# Altium PCB 1.PcbDoc (part 2 of 3)
Units mm, origin at the board's own origin, x right, y up, seen from the top; angles counter-clockwise.
Board outline 233.04 x 114.81 mm, 2 copper layers (Top Layer, Bottom Layer); 326 components, 324 nets, 1073 pads, 126 vias.
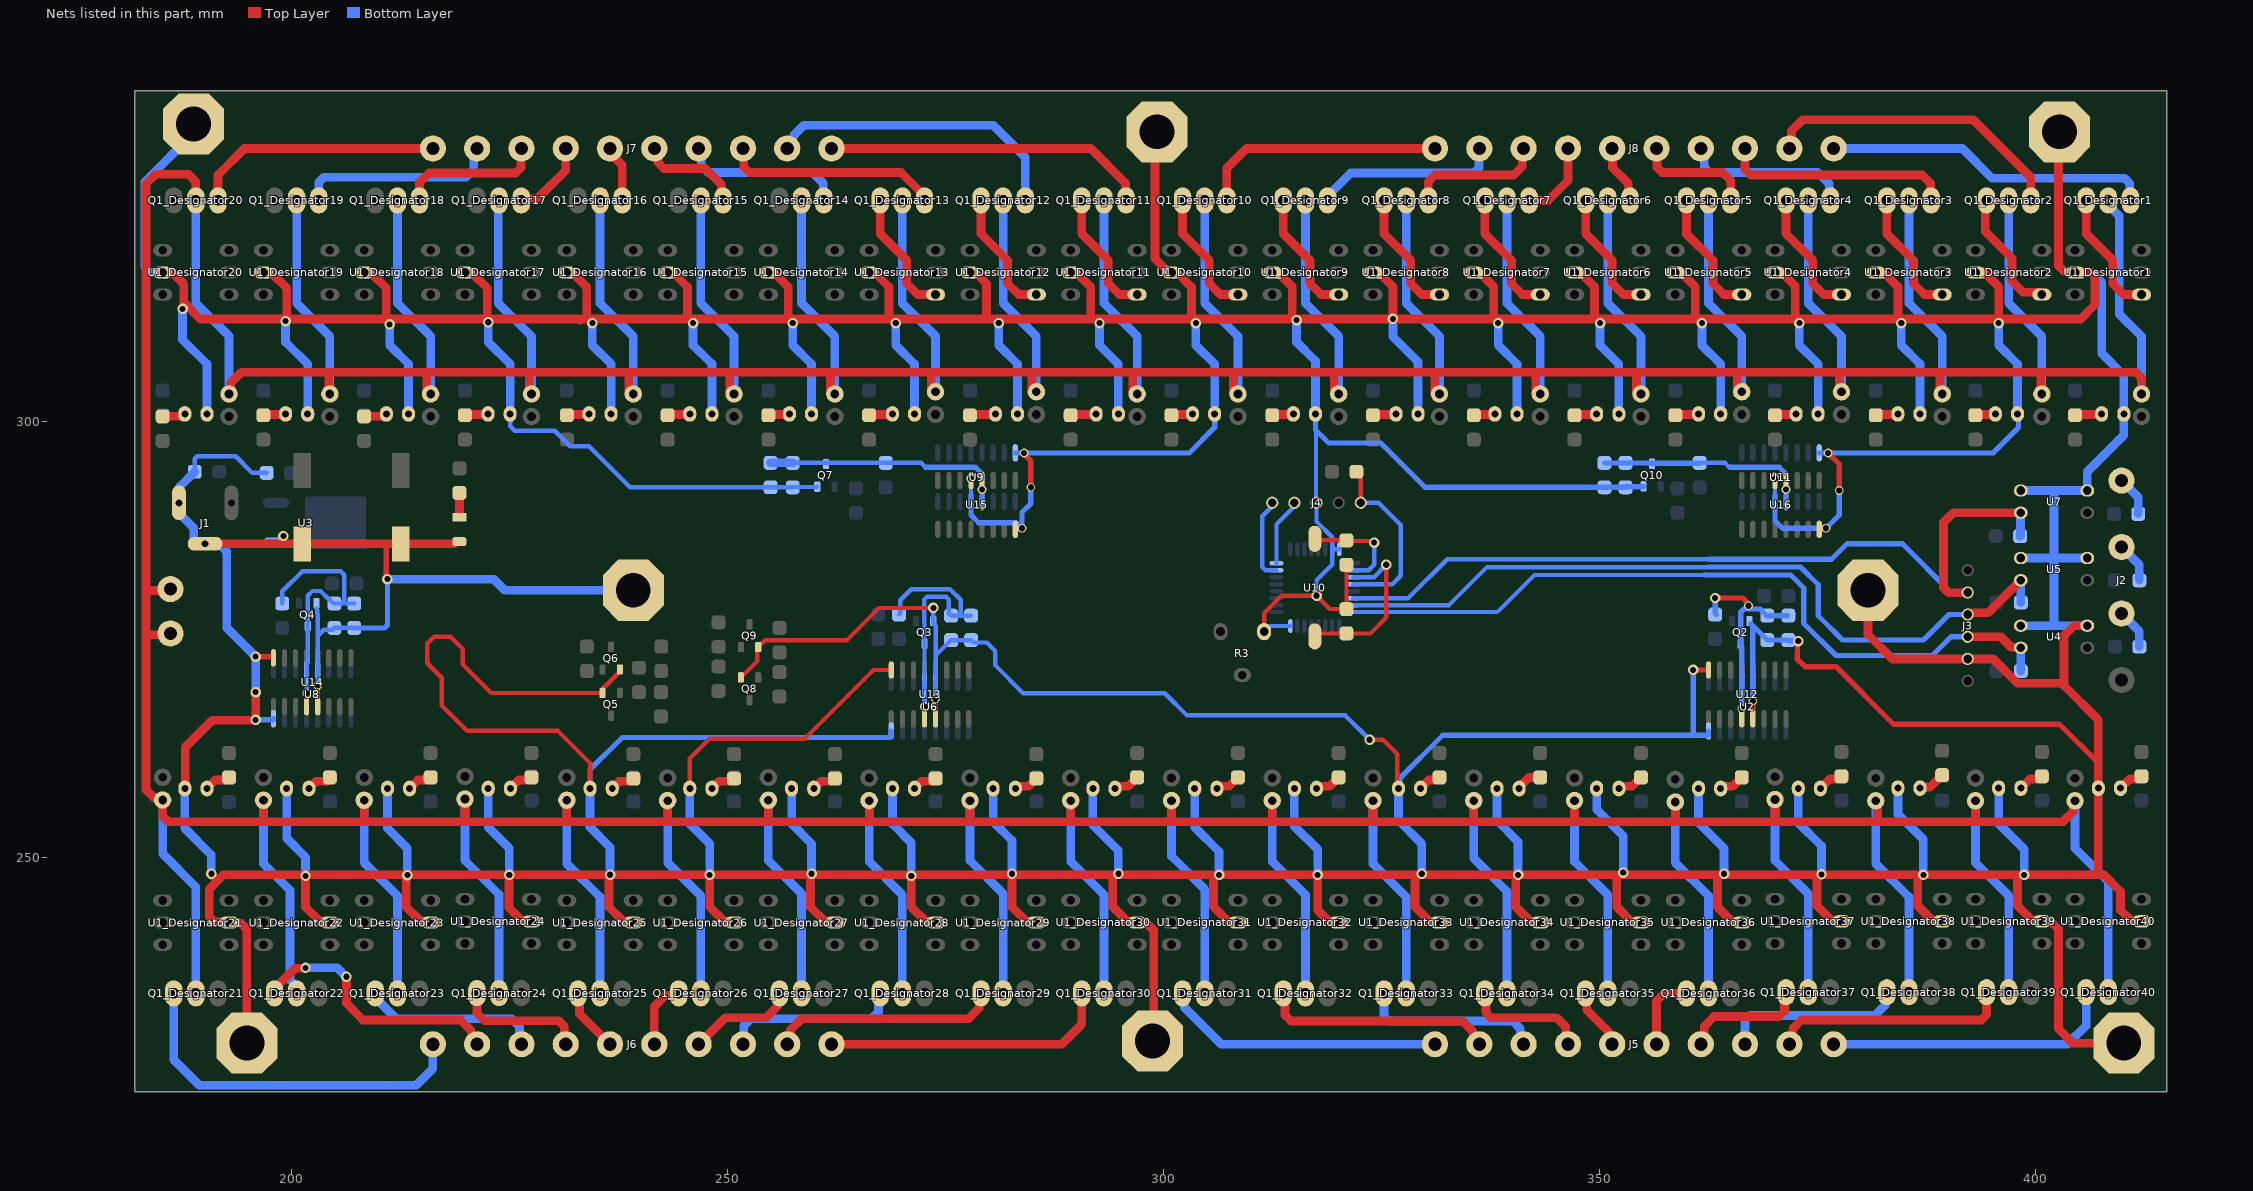
[diagram p2: the nets of this part, all layers, seen from the top]

## Via types
v1: diameter 1.2, hole 0.7, Top Layer to Bottom Layer, 83 vias
v2: diameter 1, hole 0.7, Top Layer to Bottom Layer, 40 vias
v3: diameter 1, hole 0.5, Top Layer to Bottom Layer, 3 vias

## Nets (pads, with @x,y where several pads share a name; then routed paths per layer and width w, separated by ;. In a path a pad name is that pad's centre, name@x,y a point inside that pad or via, vN(x,y) a via of type N, cw(c..) or ccw(c..) an arc to the next point about the centre after c; other vN are vias at no path point) (continued)
GND: C1.2 C2.2 C3.1 C4.1 C5.1 C6.1 C7.1 C8.2 C9.1 C10.2 C11.1 C12.1 C13.1 C14.1 C15.1 C16.1 D1.2 D2.2 D3.2 D4.2 D5.2 D6.2 D7.2 D8.2 D9.2 D10.2 D11.2 D12.2 D13.2 D14.2 D15.2 D16.2 D17.2 D18.2 D19.2 D20.2 D21.2 D22.2 D23.2 D24.2 D25.2 D26.2 D27.2 D28.2 D29.2 D30.2 D31.2 D32.2 D33.2 D34.2 D35.2 D36.2 D37.2 D38.2 D39.2 D40.2 D41.2 J1.2 J1.3 J3.2 J4.3 M1.1 M2.1 M3.1 M4.1 M5.1 M6.1 M7.1 M8.1 Q2.2 Q3.2 Q4.2 Q5.2 Q6.2 Q7.2 Q8.2 Q9.2 Q10.2 R3.1 U1_Designator1.2 U1_Designator2.2 U1_Designator3.2 U1_Designator4.2 U1_Designator5.2 U1_Designator6.2 U1_Designator7.2 U1_Designator8.2 U1_Designator9.2 U1_Designator10.2 U1_Designator11.2 U1_Designator12.2 U1_Designator13.2 U1_Designator14.2 U1_Designator15.2 U1_Designator16.2 U1_Designator17.2 U1_Designator18.2 U1_Designator19.2 U1_Designator20.2 U1_Designator21.2 U1_Designator22.2 U1_Designator23.2 U1_Designator24.2 U1_Designator25.2 U1_Designator26.2 U1_Designator27.2 U1_Designator28.2 U1_Designator29.2 U1_Designator30.2 U1_Designator31.2 U1_Designator32.2 U1_Designator33.2 U1_Designator34.2 U1_Designator35.2 U1_Designator36.2 U1_Designator37.2 U1_Designator38.2 U1_Designator39.2 U1_Designator40.2 U2.8 U2.13 U3.1 U4.2 U4.3 U5.2 U5.3 U6.8 U6.13 U7.2 U7.3 U8.8 U8.13 U9.8 U9.13 U10.16 U10.31 U10.32 U11.8 U11.13 U12.8 U12.13 U13.8 U13.13 U14.8 U14.13 U15.8 U15.13 U16.8 U16.13 | length 2085.3
  Top Layer w0.5: U14.13@202.946,267.323 v2(202.946,269.748) ; D17.2@234.188,257.937 234.188,260.858 230.505,264.541 220.091,264.541 217.17,267.462 217.17,270.637 215.519,272.288 215.519,274.574 216.281,275.336 218.186,275.336 219.583,273.939 219.583,272.161 222.855,268.889 Q5.2@235.601,268.889 235.701,268.989 235.701,269.429 237.601,271.329 Q6.2@237.601,271.579 ; D16.2@245.618,257.937 245.618,261.366 247.904,263.652 258.826,263.652 266.7,271.526 U13.8@268.732,271.526 ; Q8.2@251.476,270.667 251.476,270.917 251.576,271.017 251.826,271.017 253.376,272.567 253.376,274.063 Q9.2@253.476,274.163 253.476,274.413 253.576,274.513 253.826,274.513 254.268,274.955 263.652,274.955 267.335,278.638 v1(273.558,278.638) ; R3.1@311.491,275.931 311.491,278.05 313.476,280.035 v1(317.5,280.035) 319.021,278.514 C10.2@320.929,278.514 C8.2@320.929,283.588 ; v1(323.596,263.525) 325.12,263.525 326.771,261.874 326.771,258.064 D9.2@326.898,257.937
  Top Layer w0.6: v1(195.834,273.05) 197.866,273.05 U14.8@197.866,272.923 ; 210.82,285.995 210.82,282.067 v1(210.947,281.94) ; U13.13@273.812,265.926 v2(273.812,268.224) ; U15.8@282.956,287.655 282.956,287.719 283.654,287.719 v2(283.718,287.782) ; v2(283.972,296.418) 283.972,296.256 284.734,295.494 v2(284.734,292.478) ; v1(360.68,271.526) U12.8@362.458,271.526 ; U12.13@367.538,265.926 367.538,266.626 367.563,266.651 367.563,267.945 v2(367.538,267.97) ; v1(372.745,274.828) 372.668,274.751 372.668,273.443 372.618,273.393 372.618,272.796 373.507,271.907 377.063,271.907 383.667,265.303 402.717,265.303 407.162,260.858 ; U16.8@375.158,287.655 375.158,287.719 375.856,287.719 v2(375.92,287.782) ; v2(376.174,296.418) 377.444,295.148 v2(377.444,292.1)
  Top Layer w1: U1_Designator20.2@185.166,317.119 185.243,317.042 186.36,317.042 187.579,315.823 187.579,313.69 189.484,311.785 v1@199.39,311.785 ; D21.2@187.706,257.937 187.747,257.978 187.747,262.677 190.836,265.766 195.789,265.766 v1(195.834,265.811) v1(195.834,268.986) ; v1(190.754,248.158) 190.754,248.104 191.326,247.532 191.326,247.206 ; J1.3@191.437,286.003 201.16,286.003 C2.2@201.168,285.995 210.82,285.995 C1.2@212.471,285.995 218.642,285.995 218.902,286.255 D1.2@219.202,286.255 ; M6.1@194.818,228.727 194.818,241.808 194.145,242.481 192.863,242.481 192.709,242.635 191.086,242.635 190.5,243.22 190.5,246.38 191.326,247.206 ; U1_Designator19.2@196.596,317.042 197.677,317.042 199.39,315.329 v1@199.39,311.785 ; U1_Designator22.2@204.343,242.635 203.262,242.635 201.549,244.348 v1(201.549,247.904) v1@201.549,248.031 ; U1_Designator18.2@208.026,317.042 209.107,317.042 210.82,315.329 210.82,311.785 ; U1_Designator23.2@215.9,242.635 214.819,242.635 213.106,244.348 v1@213.106,248.031 ; U1_Designator17.2@219.583,317.042 220.664,317.042 222.377,315.329 222.377,311.912 v1@222.323,311.885 ; 222.023,311.785 210.82,311.785 ; v1@222.123,311.785 222.504,311.785 232.727,311.785 232.802,311.71 232.993,311.71 233.045,311.658 ; U1_Designator24.2@227.457,242.762 226.376,242.762 224.879,244.259 224.879,247.993 v1(224.917,248.031) ; U1_Designator16.2@231.013,317.169 232.094,317.169 233.807,315.456 233.807,311.785 ; 233.045,311.785 233.807,311.785 ; U1_Designator25.2@239.141,242.635 238.06,242.635 236.347,244.348 236.347,248.031 v1@236.349,248.031 ; U1_Designator15.2@242.57,317.169 243.651,317.169 245.364,315.456 245.364,311.785 ; U1_Designator26.2@250.698,242.635 249.617,242.635 247.904,244.348 v1(247.904,248.031) ; U1_Designator14.2@254.127,317.169 255.208,317.169 256.921,315.456 256.921,311.785 ; U1_Designator27.2@262.255,242.635 261.174,242.635 259.461,244.348 v1@259.461,248.031 ; U1_Designator13.2@265.684,317.169 266.765,317.169 268.478,315.456 268.478,311.785 ; U1_Designator28.2@273.812,242.635 272.731,242.635 271.018,244.348 v1(271.018,247.904) v1@271.018,248.031 ; U1_Designator12.2@277.241,317.169 278.322,317.169 279.654,315.837 279.654,311.785 ; U1_Designator29.2@285.369,242.635 284.288,242.635 282.575,244.348 v1@282.575,248.031 ; U1_Designator11.2@288.798,317.169 289.879,317.169 291.592,315.456 291.592,311.785 ; U1_Designator30.2@296.926,242.647 295.845,242.647 294.132,244.36 294.132,248.031 ; U1_Designator30.2@297.218,242.57 U1_Designator30.2@296.926,242.57 297.003,242.493 298.019,242.493 298.826,241.686 298.826,229.103 M4.1@298.704,228.981 ; M3.1@299.212,331.47 298.963,331.221 298.963,318.727 300.571,317.119 U1_Designator10.2@300.863,317.119 ; U1_Designator10.2@300.863,317.169 301.436,317.169 303.149,315.456 303.149,311.785 ; U1_Designator31.2@308.483,242.647 307.402,242.647 305.689,244.36 305.689,248.031 ; U1_Designator9.2@311.912,317.181 312.993,317.181 314.706,315.468 v1@314.706,311.785 ; U1_Designator32.2@320.04,242.647 318.959,242.647 317.627,243.979 v1(317.627,248.031) ; U1_Designator8.2@323.469,317.181 324.55,317.181 326.263,315.468 v1(326.263,311.785) ; U1_Designator33.2@331.597,242.647 330.516,242.647 328.803,244.36 328.803,248.031 ; U1_Designator7.2@335.026,317.181 336.107,317.181 337.82,315.468 337.82,311.785 ; U1_Designator34.2@343.154,242.647 342.073,242.647 340.36,244.36 v1@340.36,248.031 ; U1_Designator6.2@346.583,317.181 347.664,317.181 349.377,315.468 349.377,311.785 ; U1_Designator35.2@354.711,242.647 353.63,242.647 351.917,244.36 351.917,248.031 ; U1_Designator5.2@358.14,317.181 359.221,317.181 360.934,315.468 360.934,311.785 360.932,311.785 ; v1@364.236,248.031 363.474,248.031 ; v1(364.236,248.158) 364.288,248.106 364.479,248.106 364.554,248.031 v1@375.158,248.031 ; U1_Designator36.2@366.268,242.647 365.187,242.647 363.474,244.36 363.474,248.031 ; U1_Designator4.2@369.824,317.054 370.905,317.054 372.402,315.557 372.402,311.823 372.364,311.785 ; v1@374.958,247.931 374.904,247.904 374.904,244.487 376.617,242.774 U1_Designator37.2@377.698,242.774 ; v1@375.258,248.031 386.461,248.031 ; M2.1@380.746,280.67 380.746,275.59 383.54,272.796 J3.2@392.176,272.796 395.097,272.796 397.891,270.002 403.225,270.002 ; U1_Designator3.2@381.381,317.181 382.462,317.181 384.175,315.468 384.175,311.785 ; U1_Designator38.2@389.255,242.774 388.174,242.774 386.461,244.487 386.461,248.031 ; U1_Designator2.2@392.938,317.181 394.019,317.181 395.732,315.468 v1@395.732,311.785 ; U1_Designator39.2@400.685,242.774 399.604,242.774 397.891,244.487 397.891,248.031 ; U1_Designator39.2@400.977,242.697 U1_Designator39.2@400.685,242.697 400.762,242.62 401.778,242.62 402.585,241.813 402.585,230.383 404.241,228.727 M5.1@410.083,228.727 ; M8.1@403.479,333.121 402.595,332.237 402.595,317.902 403.301,317.196 404.418,317.196 U1_Designator1.2@404.495,317.119 ; U1_Designator1.2@404.572,317.181 406.195,317.181 406.781,316.596 406.781,313.436 405.13,311.785 v1@395.732,311.785 ; U4.2@405.892,276.606 404.368,276.606 403.225,275.463 403.225,270.002 ; U1_Designator40.2@412.115,242.697 412.038,242.774 410.921,242.774 409.702,243.993 409.702,246.126 407.797,248.031 407.162,248.031 ; 191.326,247.206 192.151,248.031 v1@201.549,248.031 ; v1@199.39,311.785 210.82,311.785 ; v1@201.549,248.031 v1@213.106,248.031 ; v1@213.106,248.031 v1(224.917,248.031) ; v1(224.917,248.031) 224.92,248.034 236.349,248.034 v1@236.349,248.031 ; 233.807,311.785 234.442,311.785 245.364,311.785 ; v1@236.349,248.031 v1(247.904,248.031) ; 245.364,311.785 245.999,311.785 256.921,311.785 ; v1(247.904,248.031) v1@259.461,248.031 ; 256.921,311.785 257.429,311.785 268.478,311.785 ; v1@259.461,248.031 v1@271.018,248.031 ; 268.478,311.785 269.24,311.785 279.654,311.785 ; v1@271.018,248.031 v1@282.575,248.031 ; 279.654,311.785 281.051,311.785 291.592,311.785 ; v1@282.575,248.031 294.132,248.031 ; 291.592,311.785 292.608,311.785 303.149,311.785 ; 294.132,248.031 305.689,248.031 ; 303.149,311.785 303.657,311.785 v1@314.706,311.785 ; 305.689,248.031 v1(306.324,248.031) v1(317.627,248.031) ; v1@314.706,311.785 315.214,311.785 v1(326.263,311.785) ; v1(317.627,248.031) 328.803,248.031 ; v1(326.263,311.785) 337.82,311.785 ; 328.803,248.031 v1@340.36,248.031 ; 337.82,311.785 338.328,311.785 349.377,311.785 ; v1@340.36,248.031 v1(340.614,248.031) 351.917,248.031 ; 349.377,311.785 350.012,311.785 360.932,311.785 ; 351.917,248.031 363.474,248.031 ; 360.932,311.785 360.932,311.782 361.696,311.782 372.361,311.782 372.364,311.785 ; 372.364,311.785 372.872,311.785 384.175,311.785 ; 384.175,311.785 384.556,311.785 v1@395.732,311.785 ; 386.461,248.031 v1(387.096,248.031) 397.891,248.031 ; 397.891,248.031 v1(398.653,248.031) 407.162,248.031 ; 403.225,270.002 403.225,269.748 407.162,265.811 407.162,260.858 D2.2@407.162,257.967 407.162,248.031
  Bottom Layer w0.5: C3.1@188.846,294.259 188.846,295.744 189.139,296.037 193.548,296.037 195.453,294.132 C6.1@197.101,294.132 ; 202.803,278.541 202.903,278.441 202.903,277.947 202.946,277.904 202.946,275.463 ; v2(202.946,269.748) U8.13@202.946,271.532 202.946,275.463 ; C14.1@207.137,276.349 C7.1@204.851,276.349 204.647,276.145 203.628,276.145 202.946,275.463 ; D25.2@225.018,300.896 225.018,299.492 225.552,298.958 230.124,298.958 231.902,297.18 234.061,297.18 238.76,292.481 C15.1@254.889,292.481 254.891,292.479 257.428,292.479 C9.1@257.429,292.478 257.464,292.513 260.204,292.513 Q7.2@260.239,292.548 ; Q3.2@273.542,276.894 273.866,276.57 273.866,276.406 273.812,276.352 273.812,273.174 ; Q3.2@273.542,277.144 273.55,277.152 273.55,278.63 v1(273.558,278.638) ; U6.13@273.812,270.135 273.812,273.174 ; U9.13@277.876,290.824 v2(277.876,293.497) ; R3.1@311.491,275.931 311.589,275.931 312.227,276.569 U10.16@314.503,276.569 ; D33.2@317.373,300.896 317.436,300.832 317.436,290.767 J4.3@317.5,290.703 317.5,288.544 319.303,286.741 U10.31@319.303,285.369 ; v1(317.5,280.035) 317.5,281.813 319.303,283.616 U10.31@319.303,285.369 ; U10.32@320.103,285.369 U10.31@319.303,285.369 ; v1(323.596,263.525) 320.802,266.319 302.641,266.319 300.101,268.859 283.845,268.859 280.67,272.034 280.67,273.685 279.683,274.673 278.155,274.673 C5.1@277.876,274.952 C13.1@275.59,274.952 273.812,273.174 ; U11.13@370.078,290.824 v2(370.078,293.497)
  Bottom Layer w0.6: v1(195.834,265.811) 197.866,265.811 U8.8@197.866,265.932 ; C14.1@207.137,276.349 207.139,276.351 210.596,276.351 210.947,276.702 v1(210.947,281.94) ; D17.2@234.188,257.937 234.188,260.096 237.871,263.779 268.381,263.779 268.437,263.835 268.732,263.835 U6.8@268.732,264.535 ; D26.2@236.601,300.896 D26.2@236.608,300.889 ; D27.2@248.158,300.896 D27.2@248.165,300.889 ; D28.2@259.588,300.896 D28.2@259.595,300.889 ; D29.2@271.399,300.896 D29.2@271.406,300.889 ; v2(273.812,268.224) U6.13@273.812,270.135 ; U9.13@277.876,290.824 277.876,289.306 278.765,288.417 283.083,288.417 v2(283.718,287.782) 283.718,289.613 284.734,290.629 v2(284.734,292.478) ; U9.8@282.956,296.424 282.956,296.421 283.969,296.421 v2(283.972,296.418) 302.895,296.418 305.816,299.339 D32.2@305.816,300.896 ; D30.2@283.21,300.896 D30.2@283.217,300.889 ; D31.2@294.767,300.896 D31.2@294.774,300.889 ; 305.816,301.879 D32.2@305.816,300.896 ; D32.2@305.823,300.889 D32.2@305.816,300.896 ; D33.2@317.373,300.896 317.373,299.085 318.897,297.561 324.866,297.561 329.949,292.478 C16.1@350.52,292.478 C11.1@352.933,292.478 352.983,292.528 354.931,292.528 Q10.2@354.981,292.578 ; D9.2@326.898,257.937 327.032,258.071 327.032,259.087 331.978,264.033 360.703,264.033 ; D35.2@340.487,300.896 D35.2@340.494,300.889 ; D36.2@352.171,300.896 D36.2@352.178,300.889 ; v1(360.68,271.526) 360.703,271.503 360.703,264.033 ; U2.8@362.458,264.535 362.458,264.033 360.703,264.033 ; D37.2@363.855,300.896 D37.2@363.862,300.889 ; Q2.2@367.297,276.844 C12.1@369.189,274.952 371.475,274.952 371.537,274.89 372.683,274.89 v1(372.745,274.828) ; v2(367.538,267.97) U2.13@367.538,270.135 367.538,276.497 ; U11.13@370.078,290.824 370.078,288.641 370.937,287.782 v2(375.92,287.782) 377.444,289.306 v2(377.444,292.1) ; D38.2@375.031,300.896 D38.2@375.038,300.889 ; U11.8@375.158,296.424 375.158,296.421 376.171,296.421 v2(376.174,296.418) 395.097,296.418 398.018,299.339 398.018,301.879 ; D39.2@386.715,300.896 D39.2@386.722,300.889 ; D40.2@397.891,300.896 D40.2@397.898,300.889 ; 407.41,296.043 407.543,295.91
  Bottom Layer w1: U1_Designator20.2@185.166,317.119 183.72,317.119 183.134,317.705 183.134,327.533 M7.1@188.722,333.121 ; v1(187.452,312.928) 187.452,309.405 190.246,306.611 D22.2@190.246,300.896 ; D21.2@187.706,257.937 187.706,253.365 190.754,250.317 v1(190.754,248.158) ; C3.1@188.846,294.259 187.155,292.568 187.155,290.818 J1.2@187.04,290.703 187.04,289.503 188.725,287.818 188.725,286.28 189.002,286.003 J1.3@190.04,286.003 ; J1.3@191.437,285.968 191.702,285.703 191.946,285.703 192.532,285.117 192.532,276.352 v1(195.834,273.05) v1(195.834,268.986) ; U3.1@197.224,286.117 U3.1@197.545,286.117 ; U3.1@197.623,286.117 U3.1@198.178,286.117 ; v1(199.263,311.531) 199.263,309.151 201.803,306.611 D23.2@201.803,300.896 ; D20.2@199.39,257.937 199.39,252.222 201.549,250.063 v1(201.549,247.904) ; D19.2@210.947,257.937 210.947,253.365 213.233,251.079 v1(213.233,248.011) ; v1(210.947,281.94) 223.139,281.94 224.409,280.67 M1.1@239.141,280.67 ; v1@211.201,310.929 211.201,308.77 213.36,306.611 D24.2@213.36,300.896 ; D18.2@222.504,257.937 222.504,253.492 224.917,251.079 v1(224.917,248.031) ; v1@222.504,311.279 222.504,309.125 225.018,306.611 D25.2@225.018,300.896 ; D17.2@234.188,257.937 234.188,253.492 236.474,251.206 v1(236.474,248.036) ; v1@234.442,310.929 234.442,308.77 236.601,306.611 D26.2@236.601,300.896 ; D16.2@245.618,257.937 245.618,253.873 247.904,251.587 v1(247.904,248.031) ; v1@245.999,310.929 245.999,308.77 248.158,306.611 D27.2@248.158,300.896 ; D15.2@257.302,257.937 257.302,253.873 259.588,251.587 v1(259.588,248.158) ; v1@257.429,310.929 257.429,308.77 259.588,306.611 D28.2@259.588,300.896 ; D14.2@268.859,257.937 268.859,253.873 271.018,251.714 v1(271.018,247.904) ; v1@269.24,310.929 269.24,308.77 271.399,306.611 D29.2@271.399,300.896 ; D13.2@280.416,257.937 280.416,254.127 282.575,251.968 v1(282.575,248.158) ; v1@281.051,310.929 281.051,308.77 283.21,306.611 D30.2@283.21,300.896 ; D12.2@291.846,257.937 291.846,253.746 294.767,250.825 v1(294.767,248.158) ; v1@292.608,310.929 292.608,308.77 294.767,306.611 D31.2@294.767,300.896 ; D11.2@303.53,257.937 303.53,253.492 306.324,250.698 v1(306.324,248.031) ; v1@303.657,310.929 303.657,308.77 305.816,306.611 305.816,301.879 ; D10.2@314.96,257.937 314.96,253.619 317.627,250.952 v1(317.627,248.031) ; v1@315.214,311.277 315.214,309.118 317.373,306.959 D33.2@317.373,301.244 ; v1(326.263,311.785) 326.263,309.753 329.147,306.869 D34.2@329.147,300.896 ; D9.2@326.898,257.937 326.898,254.254 329.565,251.587 v1(329.565,248.158) ; D8.2@338.201,257.937 338.201,254.254 340.614,251.841 v1(340.614,248.031) ; v1@338.328,310.929 338.328,308.77 340.487,306.611 D35.2@340.487,300.896 ; D7.2@349.631,257.937 349.631,255.524 352.679,252.476 v1(352.679,248.285) ; v1@350.012,310.929 350.012,308.77 352.171,306.611 D36.2@352.171,300.896 ; D6.2@361.315,257.937 361.315,254 364.236,251.079 v1(364.236,248.158) ; v1@361.696,310.929 361.696,308.77 363.855,306.611 D37.2@363.855,300.896 ; D5.2@372.745,257.937 372.745,254 375.412,251.333 v1(375.412,248.073) ; v1@372.872,310.929 372.872,308.77 375.031,306.611 D38.2@375.031,300.896 ; D4.2@384.175,257.967 384.175,255.016 387.096,252.095 v1(387.096,248.031) ; v1@384.556,310.929 384.556,308.77 386.715,306.611 D39.2@386.715,300.896 ; D3.2@395.732,257.967 395.732,253.873 398.653,250.952 v1(398.653,248.031) ; v1@395.732,310.929 395.732,308.77 397.891,306.611 D40.2@397.891,300.896 ; U4.3@398.272,276.606 402.082,276.606 ; U5.3@398.272,284.357 402.082,284.357 ; U7.3@398.272,292.1 402.082,292.1 ; U1_Designator1.2@404.495,317.119 406.4,317.119 407.543,315.976 407.543,307.848 410.083,305.308 D41.2@410.083,300.896 410.083,298.45 407.543,295.91 405.892,294.259 U7.2@405.892,292.1 402.082,292.1 ; U4.2@405.892,276.606 402.082,276.606 ; U5.2@405.892,284.357 402.082,284.357 ; 402.082,276.606 402.082,284.357 ; 402.082,284.357 402.082,292.1
  other v1: 199.009,286.893 211.201,311.15 234.442,311.31 245.999,311.31 257.429,311.31 269.24,311.31 281.051,311.31 292.608,311.31 303.657,311.31 338.328,311.31 350.012,311.31 361.696,311.31 372.872,311.31 384.556,311.31 395.732,311.31 222.504,311.404 315.214,311.658
NetC4_2: C4.2 C12.2 Q2.3 R11.2 U2.12 U12.12 | length 24.5
  Top Layer w0.6: v1(363.22,279.781) 366.395,279.781 366.953,279.223 366.953,278.969 v2(367.03,278.892)
  Bottom Layer w0.6: v1(363.22,279.781) 363.22,278.009 R11.2@363.347,277.882 ; Q2.3@366.141,274.544 366.141,278.16 ; Q2.3@366.191,274.657 366.191,274.244 366.268,274.167 U2.12@366.268,270.135 v2(366.268,267.081) ; v2(367.03,278.892) 366.922,278.892 366.189,278.16 366.141,278.16 ; C4.2@371.475,277.752 369.135,277.752 368.376,278.511 366.492,278.511 366.141,278.16
NetC5_2: C5.2 C13.2 Q3.3 R13.2 U6.12 U13.12 | length 32.5
  Top Layer w0.6: U13.12@272.542,265.926 v2(272.542,267.335)
  Bottom Layer w0.5: R13.2@269.621,277.882 269.748,278.009 269.748,279.527 271.018,280.797 275.463,280.797 276.692,279.568 276.692,277.752 ; U6.12@272.542,270.135 Q3.3@272.542,274.544 272.542,276.966 272.508,277 272.508,279.615 272.801,279.908 275.019,279.908 275.312,279.615 275.312,278.03 C13.2@275.59,277.752 276.692,277.752 ; C5.2@277.876,277.752 276.692,277.752
  Bottom Layer w0.6: v2(272.542,267.335) U6.12@272.542,270.135
NetC7_2: C7.2 C14.2 Q4.3 R15.2 U8.12 U14.12 | length 31.8
  Top Layer w0.5: U14.12@201.676,267.323 v2(201.676,268.859)
  Bottom Layer w0.5: R15.2@198.882,279.149 198.882,280.543 201.168,282.829 205.613,282.829 205.994,282.448 205.994,279.149 ; v2(201.676,268.859) 201.676,272.259 201.803,272.386 Q4.3@201.803,276.576 201.803,280.035 202.348,280.58 203.278,280.58 204.159,279.699 204.22,279.699 204.77,279.149 205.994,279.149 ; C14.2@207.137,279.149 205.994,279.149
NetC8_1: C8.1 U10.2 X1.2 | length 12.2
  Top Layer w0.5: X1.2@317.303,286.569 317.484,286.388 C8.1@320.929,286.388 320.994,286.323 323.777,286.323 323.969,286.131 v1(324.104,286.131)
  Bottom Layer w0.5: U10.2@321.703,282.969 323.482,282.969 324.104,283.591 v1(324.104,286.131)
NetC9_2: C9.2 C15.2 Q7.3 R22.2 U9.12 U15.12 | length 28.7
  Top Layer w0.6: v2(279.146,292.227) U15.12@279.146,293.255
  Bottom Layer w0.5: C9.2@257.683,295.281 260.223,295.281 ; 260.223,295.278 260.226,295.281 263.9,295.281 263.903,295.278 R22.2@268.097,295.278 272.158,295.278 272.658,294.778 ; U9.12@279.146,290.824 v2(279.146,292.227)
  Bottom Layer w0.6: 272.658,294.778 278.373,294.778 279.146,294.005 v2(279.146,292.227)
  Bottom Layer w1: C15.2@254.889,295.281 254.891,295.279 257.428,295.279 C9.2@257.429,295.278
NetC10_1: C10.1 U10.3 X1.1 | length 19.5
  Top Layer w0.5: X1.1@317.303,275.369 317.648,275.714 C10.1@320.929,275.714 323.684,275.714 325.501,277.531 v1(325.501,283.591)
  Bottom Layer w0.5: U10.3@321.703,282.169 324.079,282.169 v1(325.501,283.591)
NetC11_2: C11.2 C16.2 Q10.3 R28.2 U11.12 U16.12 | length 24.6
  Bottom Layer w0.5: R28.2@361.442,295.278 364.36,295.278 364.86,294.778 ; U11.12@371.348,290.824 v2(371.348,292.227)
  Bottom Layer w0.6: C16.2@350.52,295.278 C11.2@352.933,295.278 Q10.3@355.981,295.278 ; Q10.3@355.981,295.178 356.031,295.228 361.392,295.228 R28.2@361.442,295.278 ; 364.86,294.778 370.575,294.778 371.348,294.005 v2(371.348,292.227)
NetD1_1: D1.1 R8.1 | length 2.8
  Top Layer w1: D1.1@219.202,289.055 R8.1@219.202,291.843
NetD2_1: D2.1 R30.1 | length 3
  Top Layer w1: D2.1@409.702,257.967 409.702,257.982 410.751,259.031 411.815,259.031 R30.1@412.115,259.331
NetD3_1: D3.1 R31.1 | length 3
  Top Layer w1: D3.1@398.272,257.967 398.272,257.982 399.321,259.031 400.385,259.031 R31.1@400.685,259.331
NetD4_1: D4.1 R32.1 | length 3.2
  Top Layer w1: D4.1@386.715,257.967 386.845,258.097 387.891,258.097 R32.1@389.255,259.461
NetD5_1: D5.1 R33.1 | length 3
  Top Layer w1: D5.1@375.285,257.937 375.285,257.952 376.364,259.031 377.398,259.031 R33.1@377.698,259.331
NetD6_1: D6.1 R34.1 | length 2.9
  Top Layer w1: D6.1@363.855,257.937 363.855,257.952 364.086,258.183 365.247,258.183 366.214,259.15 R34.1@366.214,259.204
NetD7_1: D7.1 R35.1 | length 3.1
  Top Layer w1: D7.1@352.171,257.937 352.171,257.952 352.402,258.183 353.69,258.183 R35.1@354.711,259.204
NetD8_1: D8.1 R36.1 | length 3
  Top Layer w1: D8.1@340.741,257.937 340.741,258.087 341.861,259.207 343.148,259.207 R36.1@343.154,259.201
NetD9_1: D9.1 R37.1 | length 2.7
  Top Layer w1: D9.1@329.438,257.937 329.438,257.952 330.387,258.901 331.297,258.901 R37.1@331.597,259.201
NetD10_1: D10.1 R38.1 | length 3.1
  Top Layer w1: D10.1@317.5,257.937 317.5,257.952 317.731,258.183 319.019,258.183 R38.1@320.04,259.204
NetD11_1: D11.1 R39.1 | length 2.9
  Top Layer w1: D11.1@306.07,257.937 306.07,257.952 306.301,258.183 307.462,258.183 R39.1@308.483,259.204
NetD12_1: D12.1 R40.1 | length 3.1
  Top Layer w1: D12.1@294.386,257.937 294.386,257.952 294.617,258.183 295.905,258.183 R40.1@296.926,259.204
NetD13_1: D13.1 R41.1 | length 2.9
  Top Layer w1: D13.1@282.956,257.937 282.956,257.952 283.187,258.183 284.475,258.183 R41.1@285.369,259.077
NetD14_1: D14.1 R42.1 | length 2.9
  Top Layer w1: D14.1@271.399,257.937 271.399,257.952 271.63,258.183 271.645,258.183 272.239,258.777 273.512,258.777 R42.1@273.812,259.077
NetD15_1: D15.1 R43.1 | length 2.9
  Top Layer w1: D15.1@259.842,257.937 259.842,257.952 260.073,258.183 260.088,258.183 260.685,258.78 261.955,258.78 R43.1@262.255,259.08
NetD16_1: D16.1 R44.1 | length 3
  Top Layer w1: D16.1@248.158,257.937 248.158,257.952 248.389,258.183 248.404,258.183 249.001,258.78 250.398,258.78 R44.1@250.698,259.08
NetD17_1: D17.1 R45.1 | length 2.9
  Top Layer w1: D17.1@236.728,257.937 236.728,257.952 236.959,258.183 236.974,258.183 237.571,258.78 238.841,258.78 R45.1@239.141,259.08
NetD18_1: D18.1 R46.1 | length 2.9
  Top Layer w1: D18.1@225.044,257.937 225.044,257.952 225.275,258.183 225.29,258.183 226.014,258.907 227.157,258.907 R46.1@227.457,259.207
NetD19_1: D19.1 R47.1 | length 2.9
  Top Layer w1: D19.1@213.487,257.937 213.487,257.952 213.718,258.183 213.733,258.183 214.454,258.904 215.6,258.904 R47.1@215.9,259.204
NetD20_1: D20.1 R48.1 | length 2.9
  Top Layer w1: D20.1@201.93,257.937 201.93,257.952 202.161,258.183 202.176,258.183 202.77,258.777 204.043,258.777 R48.1@204.343,259.077
NetD21_1: D21.1 R49.1 | length 3.1
  Top Layer w1: D21.1@190.246,257.937 190.246,257.952 190.477,258.183 190.492,258.183 191.213,258.904 192.486,258.904 R49.1@192.786,259.204
NetD22_1: D22.1 R50.1 | length 2.7
  Top Layer w1: R50.1@185.166,300.609 187.434,300.609 187.706,300.881 D22.1@187.706,300.896
NetD23_1: D23.1 R51.1 | length 2.6
  Top Layer w1: R51.1@196.723,300.739 196.801,300.817 199.185,300.817 D23.1@199.263,300.896
NetD24_1: D24.1 R52.1 | length 2.7
  Top Layer w1: R52.1@208.28,300.609 210.548,300.609 210.82,300.881 D24.1@210.82,300.896
NetD25_1: D25.1 R53.1 | length 2.7
  Top Layer w1: R53.1@219.837,300.739 219.915,300.817 222.4,300.817 D25.1@222.478,300.896
NetD26_1: D26.1 R54.1 | length 2.5
  Top Layer w1: R54.1@231.498,300.817 D26.1@233.983,300.817
NetD27_1: D27.1 R55.1 | length 2.5
  Top Layer w1: R55.1@243.055,300.817 D27.1@245.54,300.817
NetD28_1: D28.1 R56.1 | length 2.5
  Top Layer w1: R56.1@254.485,300.817 D28.1@256.97,300.817
NetD29_1: D29.1 R57.1 | length 2.5
  Top Layer w1: R57.1@266.296,300.817 D29.1@268.781,300.817
NetD30_1: D30.1 R58.1 | length 2.5
  Top Layer w1: R58.1@278.107,300.817 D30.1@280.592,300.817
NetD31_1: D31.1 R59.1 | length 2.5
  Top Layer w1: R59.1@289.664,300.817 D31.1@292.149,300.817
NetD32_1: D32.1 R60.1 | length 2.5
  Top Layer w1: R60.1@300.713,300.817 D32.1@303.198,300.817
NetD33_1: D33.1 R61.1 | length 2.5
  Top Layer w1: R61.1@312.27,300.817 D33.1@314.755,300.817
NetD34_1: D34.1 R62.1 | length 2.5
  Top Layer w1: R62.1@324.044,300.817 D34.1@326.528,300.817
NetD35_1: D35.1 R63.1 | length 2.5
  Top Layer w1: R63.1@335.384,300.817 D35.1@337.869,300.817
NetD36_1: D36.1 R64.1 | length 2.5
  Top Layer w1: R64.1@347.068,300.817 D36.1@349.553,300.817
NetD37_1: D37.1 R65.1 | length 2.5
  Top Layer w1: R65.1@358.752,300.817 D37.1@361.237,300.817
NetD38_1: D38.1 R66.1 | length 2.5
  Top Layer w1: R66.1@369.928,300.817 D38.1@372.413,300.817
NetD39_1: D39.1 R67.1 | length 2.5
  Top Layer w1: R67.1@381.612,300.817 D39.1@384.097,300.817
NetD40_1: D40.1 R68.1 | length 2.5
  Top Layer w1: R68.1@392.788,300.817 D40.1@395.273,300.817
NetD41_1: D41.1 R69.1 | length 2.5
  Top Layer w1: R69.1@404.98,300.817 D41.1@407.465,300.817
NetJ2_1: J2.1 R10.2 | length 4.6
  Bottom Layer w1: J2.1@409.829,293.243 411.737,291.335 R10.2@411.737,289.433
NetJ2_2: J2.2 R7.2 | length 4.7
  Bottom Layer w1: J2.2@409.829,285.623 411.864,283.588 R7.2@411.864,281.813
NetJ2_3: J2.3 R5.1 | length 4.7
  Bottom Layer w1: J2.3@409.829,278.003 411.864,275.968 R5.1@411.864,274.193
NetJ3_3: J3.3 R4.2 U4.4 U10.8 | length 88.6
  Top Layer w1: J3.3@392.196,275.336 395.986,275.336 397.179,274.143 398.195,274.143 U4.4@398.272,274.066
  Bottom Layer w0.5: U10.8@321.703,278.169 338.24,278.169 342.497,282.426 361.992,282.426
  Bottom Layer w0.6: 361.992,282.448 362.014,282.426 362.585,282.426 371.878,282.426 373.38,280.924 373.38,276.86 377.063,273.177 388.112,273.177 390.271,275.336 J3.3@392.176,275.336
  Bottom Layer w1: U4.4@398.272,274.066 398.273,274.065 398.273,271.401 R4.2@398.275,271.399
NetJ3_4: J3.4 R6.2 U5.4 U10.7 | length 89.2
  Top Layer w1: J3.4@392.215,277.953 392.361,277.953 392.484,278.076 394.531,278.076 U5.4@398.272,281.817
  Bottom Layer w0.5: U10.7@321.703,278.969 332.69,278.969 337.047,283.326 362.413,283.326
  Bottom Layer w0.6: 362.413,283.326 373.01,283.326 375.031,281.305 375.031,277.749 377.825,274.955 387.096,274.955 390.017,277.876 J3.4@392.176,277.876
  Bottom Layer w1: U5.4@398.272,281.817 398.273,281.815 398.273,279.275 R6.2@398.275,279.273
NetJ3_5: J3.5 R9.2 U7.4 U10.6 | length 97.8
  Top Layer w1: J3.5@392.083,280.382 390.002,280.382 389.416,280.968 389.416,288.451 390.525,289.56 U7.4@398.272,289.56
  Bottom Layer w0.5: U10.6@321.703,279.769 328.029,279.769 332.486,284.226 362.529,284.226
  Bottom Layer w0.6: 362.529,284.226 376.555,284.226 378.333,286.004 384.683,286.004 390.271,280.416 J3.5@392.176,280.416
  Bottom Layer w1: R9.2@398.189,286.879 398.23,286.921 398.23,289.518 U7.4@398.272,289.56
NetJ4_1: J4.1 R20.1 U10.4 | length 21.1
  Top Layer w0.5: R20.1@322.075,294.259 322.075,294.178 322.58,293.673 J4.1@322.58,290.703
  Bottom Layer w0.5: U10.4@321.703,281.369 326.2,281.369 327.152,282.321 327.152,288.163 324.612,290.703 J4.1@322.58,290.703
NetJ4_4: J4.4 U10.24 | length 7.8
  Bottom Layer w0.5: U10.24@312.903,283.769 312.903,288.246 314.96,290.303 J4.4@314.96,290.703
NetJ4_5: J4.5 U10.23 | length 9.6
  Bottom Layer w0.5: J4.5@312.42,290.703 312.42,290.303 311.277,289.16 311.277,283.337 311.645,282.969 312.801,282.969 U10.23@312.903,282.969
NetJ5_1: J5.1 Q1_Designator40.1 | length 33.7
  Bottom Layer w1: J5.1@376.809,228.6 403.606,228.6 405.765,230.759 Q1_Designator40.1@405.765,234.581
NetJ5_2: J5.2 Q1_Designator39.1 | length 27.4
  Top Layer w1: J5.2@371.729,228.6 372.112,228.983 372.112,230.38 373.126,231.394 393.749,231.394 394.335,231.98 Q1_Designator39.1@394.335,234.569
NetJ5_3: J5.3 Q1_Designator38.1 | length 21.1
  Bottom Layer w1: J5.3@366.649,228.6 366.649,231.316 367.235,231.902 381.508,231.902 382.714,233.108 382.714,234.378 Q1_Designator38.1@382.905,234.569
NetJ5_4: J5.4 Q1_Designator37.1 | length 14.4
  Top Layer w1: J5.4@361.569,228.6 361.952,228.983 361.952,230.634 363.093,231.775 370.508,231.775 371.157,232.423 371.157,234.378 Q1_Designator37.1@371.348,234.569
NetJ5_5: J5.5 Q1_Designator36.1 | length 8.8
  Top Layer w1: J5.5@356.489,228.6 356.489,233.553 357.378,234.442 Q1_Designator36.1@359.918,234.442
NetJ5_6: J5.6 Q1_Designator35.1 | length 7.1
  Top Layer w1: Q1_Designator35.1@348.361,234.442 348.49,234.313 348.49,232.535 351.026,229.999 351.026,228.983 J5.6@351.409,228.6
NetJ5_7: J5.7 Q1_Designator34.1 | length 14.2
  Top Layer w1: Q1_Designator34.1@336.804,234.442 336.931,234.315 336.931,232.234 337.517,231.648 345.059,231.648 346.097,230.61 346.097,228.832 J5.7@346.329,228.6
NetJ5_8: J5.8 Q1_Designator33.1 | length 20.8
  Bottom Layer w1: Q1_Designator33.1@325.247,234.442 325.247,231.853 325.833,231.267 339.979,231.267 340.866,230.38 340.866,228.983 J5.8@341.249,228.6
NetJ5_9: J5.9 Q1_Designator32.1 | length 26.7
  Top Layer w1: Q1_Designator32.1@313.69,234.442 313.881,234.251 313.881,231.965 314.579,231.267 334.264,231.267 335.429,230.102 335.429,229.882 336.169,229.141 J5.9@336.169,228.6
NetJ5_10: J5.10 Q1_Designator31.1 | length 32.2
  Bottom Layer w1: Q1_Designator31.1@302.133,234.442 302.324,234.251 302.324,232.854 306.578,228.6 J5.10@331.089,228.6
NetJ6_1: J6.1 Q1_Designator30.1 | length 33.2
  Top Layer w1: J6.1@261.874,228.6 288.29,228.6 290.576,230.886 Q1_Designator30.1@290.576,234.442
NetJ6_2: J6.2 Q1_Designator29.1 | length 26.3
  Top Layer w1: J6.2@256.794,228.6 257.177,228.983 257.177,230.253 258.445,231.521 277.589,231.521 278.828,232.759 278.828,234.251 Q1_Designator29.1@279.019,234.442
NetJ6_3: J6.3 Q1_Designator28.1 | length 20.5
  Bottom Layer w1: J6.3@251.714,228.6 251.819,228.705 251.819,230.737 252.603,231.521 266.446,231.521 267.271,232.346 267.271,234.251 Q1_Designator28.1@267.462,234.442
NetJ6_4: J6.4 Q1_Designator27.1 | length 12.4
  Top Layer w1: J6.4@246.634,228.6 249.682,231.648 254.381,231.648 255.714,232.981 255.714,234.251 Q1_Designator27.1@255.905,234.442
NetJ6_5: J6.5 Q1_Designator26.1 | length 7.7
  Top Layer w1: J6.5@241.554,228.6 241.554,232.918 242.824,234.188 244.094,234.188 Q1_Designator26.1@244.348,234.442
NetJ6_6: J6.6 Q1_Designator25.1 | length 7.4
  Top Layer w1: Q1_Designator25.1@232.791,234.442 232.982,234.251 232.982,232.092 J6.6@236.474,228.6
NetJ6_7: J6.7 Q1_Designator24.1 | length 15.1
  Top Layer w1: Q1_Designator24.1@221.208,234.468 221.208,232.182 222.079,231.311 230.588,231.311 231.225,230.674 231.225,228.769 J6.7@231.394,228.6
NetJ6_8: J6.8 Q1_Designator23.1 | length 20.5
  Bottom Layer w1: Q1_Designator23.1@209.55,234.442 209.55,233.936 211.965,231.521 225.171,231.521 226.082,230.61 226.082,228.832 J6.8@226.314,228.6
NetJ6_9: J6.9 Q1_Designator22.1 | length 30.7
  Top Layer w1: Q1_Designator22.1@197.993,234.442 197.993,234.95 200.368,237.325 201.511,237.325 v1(201.549,237.363) ; v1(206.248,236.347) 206.248,233.299 208.153,231.394 219.329,231.394 220.557,230.166 220.557,229.818 221.234,229.141 J6.9@221.234,228.6
  Bottom Layer w1: v1(201.549,237.363) 205.178,237.363 206.194,236.347 v1(206.248,236.347)
NetJ6_10: J6.10 Q1_Designator21.1 | length 42.1
  Bottom Layer w1: Q1_Designator21.1@186.436,234.442 186.436,226.822 189.357,223.901 214.249,223.901 216.154,225.806 J6.10@216.154,228.6
NetJ7_1: J7.1 Q1_Designator20.1 | length 28.8
  Top Layer w1: Q1_Designator20.1@191.516,325.374 191.516,328.295 194.564,331.343 J7.1@216.154,331.343
NetJ7_2: J7.2 Q1_Designator19.1 | length 23
  Bottom Layer w1: Q1_Designator19.1@203.073,325.374 203.073,327.455 203.659,328.041 219.964,328.041 220.851,328.928 220.851,330.96 J7.2@221.234,331.343
NetJ7_3: J7.3 Q1_Designator18.1 | length 16.6
  Top Layer w1: Q1_Designator18.1@214.63,325.374 214.632,325.376 214.632,327.408 215.737,328.513 225.643,328.513 226.272,329.142 226.272,331.301 J7.3@226.314,331.343
NetJ7_4: J7.4 Q1_Designator17.1 | length 9.1
  Top Layer w1: Q1_Designator17.1@226.288,325.374 226.467,325.553 228.144,325.553 231.394,328.803 J7.4@231.394,331.343
NetJ7_5: J7.5 Q1_Designator16.1 | length 6.5
  Top Layer w1: J7.5@236.474,331.343 236.474,330.802 237.871,329.405 Q1_Designator16.1@237.871,325.374
NetJ7_6: J7.6 Q1_Designator15.1 | length 12
  Top Layer w1: J7.6@241.554,331.343 241.937,330.96 241.937,329.775 242.668,329.043 247.41,329.043 249.237,327.216 249.237,325.565 Q1_Designator15.1@249.428,325.374
NetJ7_7: J7.7 Q1_Designator14.1 | length 18.9
  Bottom Layer w1: J7.7@246.634,331.343 246.93,331.047 246.93,329.396 247.744,328.582 259.682,328.582 260.92,327.344 260.92,325.439 Q1_Designator14.1@260.985,325.374
NetJ7_8: J7.8 Q1_Designator13.1 | length 24.8
  Top Layer w1: J7.8@251.714,331.343 251.819,331.238 251.819,329.206 252.443,328.582 269.84,328.582 272.542,325.88 Q1_Designator13.1@272.542,325.374
NetJ7_9: J7.9 Q1_Designator12.1 | length 35.3
  Bottom Layer w1: J7.9@256.794,331.343 256.794,331.884 257.534,332.625 257.534,332.845 258.699,334.01 280.416,334.01 284.099,330.327 Q1_Designator12.1@284.099,325.374
NetJ7_10: J7.10 Q1_Designator11.1 | length 37.4
  Top Layer w1: J7.10@261.874,331.343 291.592,331.343 295.591,327.344 295.591,325.439 Q1_Designator11.1@295.656,325.374
NetJ8_1: J8.1 Q1_Designator10.1 | length 28.5
  Top Layer w1: Q1_Designator10.1@307.213,325.374 307.213,329.057 309.499,331.343 J8.1@331.089,331.343
NetJ8_2: J8.2 Q1_Designator9.1 | length 21.4
  Bottom Layer w1: Q1_Designator9.1@318.77,325.374 318.77,325.874 321.409,328.513 335.498,328.513 336.127,329.142 336.127,331.301 J8.2@336.169,331.343
NetJ8_3: J8.3 Q1_Designator8.1 | length 15.8
  Top Layer w1: Q1_Designator8.1@330.327,325.374 330.327,327.533 331.089,328.295 340.106,328.295 341.08,329.269 341.08,331.174 J8.3@341.249,331.343
NetJ8_4: J8.4 Q1_Designator7.1 | length 9.1
  Top Layer w1: Q1_Designator7.1@341.884,325.374 344.043,325.374 346.329,327.66 J8.4@346.329,331.343
NetJ8_5: J8.5 Q1_Designator6.1 | length 6.8
  Top Layer w1: J8.5@351.409,331.343 351.451,331.301 351.451,329.142 353.25,327.343 353.25,325.565 Q1_Designator6.1@353.441,325.374
NetJ8_6: J8.6 Q1_Designator5.1 | length 13.6
  Top Layer w1: J8.6@356.489,331.343 356.556,331.276 356.556,329.168 357.142,328.582 364.076,328.582 364.998,327.66 Q1_Designator5.1@364.998,325.374
NetJ8_7: J8.7 Q1_Designator4.1 | length 19.4
  Bottom Layer w1: J8.7@361.569,331.343 361.952,330.96 361.952,329.168 362.537,328.582 374.998,328.582 376.299,327.281 376.299,325.503 Q1_Designator4.1@376.428,325.374
NetJ8_8: J8.8 Q1_Designator3.1 | length 26.3
  Top Layer w1: J8.8@366.649,331.343 366.649,328.93 367.284,328.295 386.969,328.295 387.92,327.344 387.92,325.439 Q1_Designator3.1@387.985,325.374
NetJ8_9: J8.9 Q1_Designator2.1 | length 35.5
  Top Layer w1: J8.9@371.729,331.343 371.961,331.575 371.961,333.353 373.253,334.645 392.811,334.645 399.415,328.041 Q1_Designator2.1@399.415,325.374
NetJ8_10: J8.10 Q1_Designator1.1 | length 37.6
  Bottom Layer w1: J8.10@376.809,331.343 391.541,331.343 394.97,327.914 410.178,327.914 410.764,327.328 410.764,325.455 Q1_Designator1.1@410.845,325.374
NetJ9_1: J9.1 J9.2 Q1_Designator1.2 Q1_Designator2.2 Q1_Designator3.2 Q1_Designator4.2 Q1_Designator5.2 Q1_Designator6.2 Q1_Designator7.2 Q1_Designator8.2 Q1_Designator9.2 Q1_Designator10.2 Q1_Designator11.2 Q1_Designator12.2 Q1_Designator13.2 Q1_Designator14.2 Q1_Designator15.2 Q1_Designator16.2 Q1_Designator17.2 Q1_Designator18.2 Q1_Designator19.2 Q1_Designator20.2 Q1_Designator21.2 Q1_Designator22.2 Q1_Designator23.2 Q1_Designator24.2 Q1_Designator25.2 Q1_Designator26.2 Q1_Designator27.2 Q1_Designator28.2 Q1_Designator29.2 Q1_Designator30.2 Q1_Designator31.2 Q1_Designator32.2 Q1_Designator33.2 Q1_Designator34.2 Q1_Designator35.2 Q1_Designator36.2 Q1_Designator37.2 Q1_Designator38.2 Q1_Designator39.2 Q1_Designator40.2 R2_Designator1.2 R2_Designator2.2 R2_Designator3.2 R2_Designator4.2 R2_Designator5.2 R2_Designator6.2 R2_Designator7.2 R2_Designator8.2 R2_Designator9.2 R2_Designator10.2 R2_Designator11.2 R2_Designator12.2 R2_Designator13.2 R2_Designator14.2 R2_Designator15.2 R2_Designator16.2 R2_Designator17.2 R2_Designator18.2 R2_Designator19.2 R2_Designator20.2 R2_Designator21.2 R2_Designator22.2 R2_Designator23.2 R2_Designator24.2 R2_Designator25.2 R2_Designator26.2 R2_Designator27.2 R2_Designator28.2 R2_Designator29.2 R2_Designator30.2 R2_Designator31.2 R2_Designator32.2 R2_Designator33.2 R2_Designator34.2 R2_Designator35.2 R2_Designator36.2 R2_Designator37.2 R2_Designator38.2 R2_Designator39.2 R2_Designator40.2 | length 1567
  Top Layer w1: 183.366,275.568 185.271,275.568 J9.1@185.293,275.59 ; 183.366,280.648 185.271,280.648 J9.2@185.293,280.67 ; Q1_Designator20.2@188.976,325.374 188.976,327.533 188.12,328.389 184.371,328.389 183.266,327.284 183.266,280.648 183.266,275.568 183.266,257.805 184.262,256.809 184.975,256.809 R2_Designator21.2@185.166,256.618 185.166,254.762 185.801,254.127 196.596,254.127 ; R2_Designator20.2@192.786,303.283 192.977,303.474 192.977,304.473 194.183,305.679 204.216,305.679 ; R2_Designator22.2@196.723,256.593 196.723,254.254 196.596,254.127 ; R2_Designator19.2@204.216,303.283 204.216,305.679 ; R2_Designator23.2@208.28,256.593 208.28,254.127 ; R2_Designator18.2@215.646,303.283 215.455,303.474 215.455,305.616 215.392,305.679 ; R2_Designator24.2@219.837,256.72 219.837,254.254 219.964,254.127 ; R2_Designator17.2@227.203,303.139 227.203,305.552 227.33,305.679 ; R2_Designator25.2@231.521,256.593 231.521,254.127 ; R2_Designator16.2@238.633,303.266 238.633,305.679 ; R2_Designator26.2@243.078,256.54 243.078,254.254 243.205,254.127 ; R2_Designator15.2@250.19,303.266 250.19,305.552 250.063,305.679 ; R2_Designator27.2@254.635,256.593 254.635,254.254 254.508,254.127 ; R2_Designator14.2@261.747,303.266 261.747,305.679 ; R2_Designator28.2@266.192,256.54 266.192,254.254 266.065,254.127 ; R2_Designator13.2@273.304,303.266 273.304,305.679 ; R2_Designator29.2@277.749,256.54 277.749,254.254 277.622,254.127 ; R2_Designator12.2@284.861,303.266 284.861,305.679 ; R2_Designator30.2@289.306,256.54 289.306,254.254 289.179,254.127 ; R2_Designator11.2@296.418,303.266 296.418,305.552 296.545,305.679 ; R2_Designator31.2@300.863,256.54 300.863,254.254 300.736,254.127 ; R2_Designator10.2@307.975,303.266 307.975,305.552 308.102,305.679 ; R2_Designator32.2@312.42,256.54 312.42,254.127 ; R2_Designator9.2@319.532,303.266 319.532,305.552 319.659,305.679 ; R2_Designator33.2@323.977,256.54 323.977,254.127 ; R2_Designator8.2@331.089,303.266 331.089,305.552 331.216,305.679 ; R2_Designator34.2@335.534,256.54 335.534,254.127 ; R2_Designator7.2@342.646,303.213 342.646,305.552 342.773,305.679 ; R2_Designator35.2@347.091,256.54 347.091,254.254 347.218,254.127 ; R2_Designator6.2@354.203,303.266 354.203,305.552 354.076,305.679 ; R2_Designator36.2@358.648,256.54 358.648,254.127 ; R2_Designator5.2@365.76,303.213 365.76,305.679 ; R2_Designator37.2@370.078,256.667 370.078,254.254 369.951,254.127 ; R2_Designator4.2@377.444,303.086 377.444,305.552 377.317,305.679 ; R2_Designator38.2@381.635,256.523 381.826,256.331 381.826,254.19 381.889,254.127 ; R2_Designator3.2@389.001,303.213 389.001,305.679 ; R2_Designator39.2@393.065,256.523 393.065,254.127 ; R2_Designator2.2@400.558,303.213 400.558,305.552 400.685,305.679 ; R2_Designator40.2@404.495,256.523 404.304,256.331 404.304,255.333 403.098,254.127 393.065,254.127 ; R2_Designator1.2@412.306,302.997 R2_Designator1.2@412.115,303.188 412.115,305.044 411.48,305.679 400.685,305.679 ; 196.596,254.127 208.28,254.127 ; 204.216,305.679 215.392,305.679 ; 208.28,254.127 219.964,254.127 ; 215.392,305.679 227.33,305.679 ; 219.964,254.127 231.521,254.127 ; 227.33,305.679 238.633,305.679 ; 231.521,254.127 243.205,254.127 ; 238.633,305.679 250.063,305.679 ; 243.205,254.127 254.508,254.127 ; 250.063,305.679 261.747,305.679 ; 254.508,254.127 266.065,254.127 ; 261.747,305.679 273.304,305.679 ; 266.065,254.127 277.622,254.127 ; 273.304,305.679 284.861,305.679 ; 277.622,254.127 289.179,254.127 ; 284.861,305.679 296.545,305.679 ; 289.179,254.127 300.736,254.127 ; 296.545,305.679 308.102,305.679 ; 300.736,254.127 312.42,254.127 ; 308.102,305.679 319.659,305.679 ; 312.42,254.127 323.977,254.127 ; 319.659,305.679 331.216,305.679 ; 323.977,254.127 335.534,254.127 ; 331.216,305.679 342.773,305.679 ; 335.534,254.127 347.218,254.127 ; 342.773,305.679 354.076,305.679 ; 347.218,254.127 358.648,254.127 ; 354.076,305.679 365.76,305.679 ; 358.648,254.127 369.951,254.127 ; 365.76,305.679 377.317,305.679 ; 369.951,254.127 381.889,254.127 ; 377.317,305.679 389.001,305.679 ; 381.889,254.127 393.065,254.127 ; 389.001,305.679 400.685,305.679
  Bottom Layer w1: R2_Designator21.2@185.166,256.618 185.166,250.444 188.976,246.634 Q1_Designator21.2@188.976,234.442 ; Q1_Designator20.2@188.976,325.286 188.976,313.602 192.786,309.792 R2_Designator20.2@192.786,303.188 ; R2_Designator22.2@196.723,256.593 196.723,249.301 199.771,246.253 199.771,235.975 200.533,235.213 Q1_Designator22.2@200.533,234.442 ; Q1_Designator19.2@200.533,325.286 200.533,313.602 204.343,309.792 R2_Designator19.2@204.343,303.188 ; R2_Designator23.2@208.28,256.593 208.28,249.428 212.09,245.618 Q1_Designator23.2@212.09,234.442 ; Q1_Designator18.2@212.09,325.286 212.09,313.602 215.9,309.792 R2_Designator18.2@215.9,303.188 ; R2_Designator24.2@219.837,256.72 219.837,249.682 223.748,245.771 Q1_Designator24.2@223.748,234.468 ; Q1_Designator17.2@223.647,325.286 223.647,313.602 227.457,309.792 R2_Designator17.2@227.457,303.188 ; R2_Designator25.2@231.521,256.593 231.521,249.301 235.331,245.491 Q1_Designator25.2@235.331,234.442 ; Q1_Designator16.2@235.331,325.286 235.331,313.602 239.141,309.792 R2_Designator16.2@239.141,303.188 ; R2_Designator26.2@243.078,256.54 243.078,249.428 246.888,245.618 Q1_Designator26.2@246.888,234.442 ; Q1_Designator15.2@246.888,325.286 246.888,313.602 250.698,309.792 R2_Designator15.2@250.698,303.188 ; R2_Designator27.2@254.635,256.593 254.635,249.682 258.445,245.872 Q1_Designator27.2@258.445,234.442 ; Q1_Designator14.2@258.445,325.286 258.445,313.602 262.255,309.792 R2_Designator14.2@262.255,303.188 ; R2_Designator28.2@266.192,256.54 266.192,249.555 270.002,245.745 Q1_Designator28.2@270.002,234.442 ; Q1_Designator13.2@270.002,325.286 270.002,313.602 273.812,309.792 R2_Designator13.2@273.812,303.188 ; R2_Designator29.2@277.749,256.54 277.749,249.682 281.559,245.872 Q1_Designator29.2@281.559,234.442 ; Q1_Designator12.2@281.559,325.286 281.559,313.602 285.369,309.792 R2_Designator12.2@285.369,303.188 ; R2_Designator30.2@289.306,256.54 289.306,249.555 293.116,245.745 Q1_Designator30.2@293.116,234.442 ; Q1_Designator11.2@293.116,325.286 293.116,313.602 296.926,309.792 R2_Designator11.2@296.926,303.188 ; R2_Designator31.2@300.863,256.54 300.863,250.19 304.673,246.38 Q1_Designator31.2@304.673,234.442 ; Q1_Designator10.2@304.673,325.286 304.673,313.602 308.483,309.792 R2_Designator10.2@308.483,303.188 ; R2_Designator32.2@312.42,256.54 312.42,249.555 316.23,245.745 Q1_Designator32.2@316.23,234.442 ; Q1_Designator9.2@316.23,325.286 316.23,313.602 320.04,309.792 R2_Designator9.2@320.04,303.188 ; R2_Designator33.2@323.977,256.54 323.977,249.301 327.787,245.491 Q1_Designator33.2@327.787,234.442 ; Q1_Designator8.2@327.787,325.286 327.787,313.602 331.597,309.792 R2_Designator8.2@331.597,303.188 ; R2_Designator34.2@335.534,256.54 335.534,249.936 339.344,246.126 Q1_Designator34.2@339.344,234.442 ; Q1_Designator7.2@339.344,325.286 339.344,313.602 343.154,309.792 R2_Designator7.2@343.154,303.188 ; R2_Designator35.2@347.091,256.54 347.091,249.555 350.901,245.745 Q1_Designator35.2@350.901,234.442 ; Q1_Designator6.2@350.901,325.286 350.901,313.602 354.711,309.792 R2_Designator6.2@354.711,303.188 ; R2_Designator36.2@358.648,256.54 358.648,249.428 362.458,245.618 Q1_Designator36.2@362.458,234.442 ; Q1_Designator5.2@362.458,325.286 362.458,313.602 366.268,309.792 R2_Designator5.2@366.268,303.188 ; R2_Designator37.2@370.078,256.667 370.078,249.682 373.888,245.872 Q1_Designator37.2@373.888,234.569 ; Q1_Designator4.2@373.888,325.286 373.888,313.602 377.698,309.792 R2_Designator4.2@377.698,303.188 ; R2_Designator38.2@381.635,256.523 381.635,249.301 385.445,245.491 Q1_Designator38.2@385.445,234.569 ; Q1_Designator3.2@385.445,325.286 385.445,313.602 389.255,309.792 R2_Designator3.2@389.255,303.188 ; R2_Designator39.2@393.065,256.523 393.065,249.428 396.875,245.618 Q1_Designator39.2@396.875,234.569 ; Q1_Designator2.2@396.875,325.286 396.875,313.602 400.685,309.792 R2_Designator2.2@400.685,303.188 ; R2_Designator40.2@404.495,256.523 404.495,251.079 408.305,247.269 Q1_Designator40.2@408.305,234.581 ; Q1_Designator1.2@408.305,325.374 408.305,324.868 409.575,323.598 409.575,312.332 412.115,309.792 R2_Designator1.2@412.115,303.188
NetQ1_Designator1_3: Q1_Designator1.3 U1_Designator1.6 | length 14.5
  Top Layer w1: Q1_Designator1.3@405.765,325.235 405.765,321.552 408.813,318.504 408.813,315.849 410.083,314.579 U1_Designator1.6@412.115,314.579
NetQ1_Designator2_3: Q1_Designator2.3 U1_Designator2.6 | length 14.5
  Top Layer w1: Q1_Designator2.3@394.208,325.489 394.208,321.806 397.256,318.758 397.256,316.103 398.526,314.833 U1_Designator2.6@400.558,314.833
NetQ1_Designator3_3: Q1_Designator3.3 U1_Designator3.6 | length 14.5
  Top Layer w1: Q1_Designator3.3@382.905,325.235 382.905,321.552 385.953,318.504 385.953,315.849 387.223,314.579 U1_Designator3.6@389.255,314.579
NetQ1_Designator4_3: Q1_Designator4.3 U1_Designator4.6 | length 14.5
  Top Layer w1: Q1_Designator4.3@371.348,325.235 371.348,321.552 374.396,318.504 374.396,315.849 375.666,314.579 U1_Designator4.6@377.698,314.579
NetQ1_Designator5_3: Q1_Designator5.3 U1_Designator5.6 | length 14.5
  Top Layer w1: Q1_Designator5.3@359.918,325.235 359.918,321.552 362.966,318.504 362.966,315.849 364.236,314.579 U1_Designator5.6@366.268,314.579
NetQ1_Designator6_3: Q1_Designator6.3 U1_Designator6.6 | length 14.5
  Top Layer w1: Q1_Designator6.3@348.361,325.235 348.361,321.552 351.409,318.504 351.409,315.849 352.679,314.579 U1_Designator6.6@354.711,314.579
NetQ1_Designator7_3: Q1_Designator7.3 U1_Designator7.6 | length 14.5
  Top Layer w1: Q1_Designator7.3@336.804,325.235 336.804,321.552 339.852,318.504 339.852,315.849 341.122,314.579 U1_Designator7.6@343.154,314.579
NetQ1_Designator8_3: Q1_Designator8.3 U1_Designator8.6 | length 14.5
  Top Layer w1: Q1_Designator8.3@325.247,325.235 325.247,321.552 328.295,318.504 328.295,315.849 329.565,314.579 U1_Designator8.6@331.597,314.579
NetQ1_Designator9_3: Q1_Designator9.3 U1_Designator9.6 | length 14.5
  Top Layer w1: Q1_Designator9.3@313.69,325.235 313.69,321.552 316.738,318.504 316.738,315.849 318.008,314.579 U1_Designator9.6@320.04,314.579
NetQ1_Designator10_3: Q1_Designator10.3 U1_Designator10.6 | length 14.5
  Top Layer w1: Q1_Designator10.3@302.133,325.235 302.133,321.552 305.181,318.504 305.181,315.849 306.451,314.579 U1_Designator10.6@308.483,314.579
NetQ1_Designator11_3: Q1_Designator11.3 U1_Designator11.6 | length 14.5
  Top Layer w1: Q1_Designator11.3@290.576,325.235 290.576,321.552 293.624,318.504 293.624,315.849 294.894,314.579 U1_Designator11.6@296.926,314.579
NetQ1_Designator12_3: Q1_Designator12.3 U1_Designator12.6 | length 14.5
  Top Layer w1: Q1_Designator12.3@279.019,325.235 279.019,321.552 282.067,318.504 282.067,315.849 283.337,314.579 U1_Designator12.6@285.369,314.579
NetQ1_Designator13_3: Q1_Designator13.3 U1_Designator13.6 | length 14.5
  Top Layer w1: Q1_Designator13.3@267.462,325.235 267.462,321.552 270.51,318.504 270.51,315.849 271.78,314.579 U1_Designator13.6@273.812,314.579

## Text inside footprints (layer, text, board x,y; h text height)
Q1_Designator23: Top Overlay "3" at 215.519,238.506 h1.02; Top Overlay "1" at 208.153,238.506 h1.02
Q1_Designator24: Top Overlay "3" at 227.177,238.532 h1.02; Top Overlay "1" at 219.811,238.532 h1.02
Q1_Designator25: Top Overlay "3" at 238.76,238.506 h1.02; Top Overlay "1" at 231.394,238.506 h1.02
Q1_Designator26: Top Overlay "3" at 250.317,238.506 h1.02; Top Overlay "1" at 242.951,238.506 h1.02
Q1_Designator27: Top Overlay "3" at 261.874,238.506 h1.02; Top Overlay "1" at 254.508,238.506 h1.02
Q1_Designator28: Top Overlay "3" at 273.431,238.506 h1.02; Top Overlay "1" at 266.065,238.506 h1.02
Q1_Designator29: Top Overlay "3" at 284.988,238.506 h1.02; Top Overlay "1" at 277.622,238.506 h1.02
Q1_Designator30: Top Overlay "3" at 296.545,238.506 h1.02; Top Overlay "1" at 289.179,238.506 h1.02
Q1_Designator31: Top Overlay "3" at 308.102,238.506 h1.02; Top Overlay "1" at 300.736,238.506 h1.02
Q1_Designator32: Top Overlay "3" at 319.659,238.506 h1.02; Top Overlay "1" at 312.293,238.506 h1.02
Q1_Designator33: Top Overlay "1" at 323.85,238.506 h1.02; Top Overlay "3" at 331.216,238.506 h1.02
Q1_Designator34: Top Overlay "3" at 342.773,238.506 h1.02; Top Overlay "1" at 335.407,238.506 h1.02
Q1_Designator35: Top Overlay "1" at 346.964,238.506 h1.02; Top Overlay "3" at 354.33,238.506 h1.02
Q1_Designator36: Top Overlay "3" at 365.887,238.506 h1.02; Top Overlay "1" at 358.521,238.506 h1.02
Q1_Designator37: Top Overlay "1" at 369.951,238.633 h1.02; Top Overlay "3" at 377.317,238.633 h1.02
Q1_Designator38: Top Overlay "1" at 381.508,238.633 h1.02; Top Overlay "3" at 388.874,238.633 h1.02
Q1_Designator39: Top Overlay "3" at 400.304,238.633 h1.02; Top Overlay "1" at 392.938,238.633 h1.02
Q1_Designator40: Top Overlay "3" at 411.734,238.645 h1.02; Top Overlay "1" at 404.368,238.645 h1.02